# Altium PCB v4简化版PCB.PcbDoc
Units mm, origin at the board's own origin, x right, y up, seen from the top; angles counter-clockwise.
Board outline 152.4 x 101.6 mm, 2 copper layers (Top Layer, Bottom Layer); 89 components, 47 nets, 272 pads, 0 vias.
Unrouted connection lines stored in the file: 15.
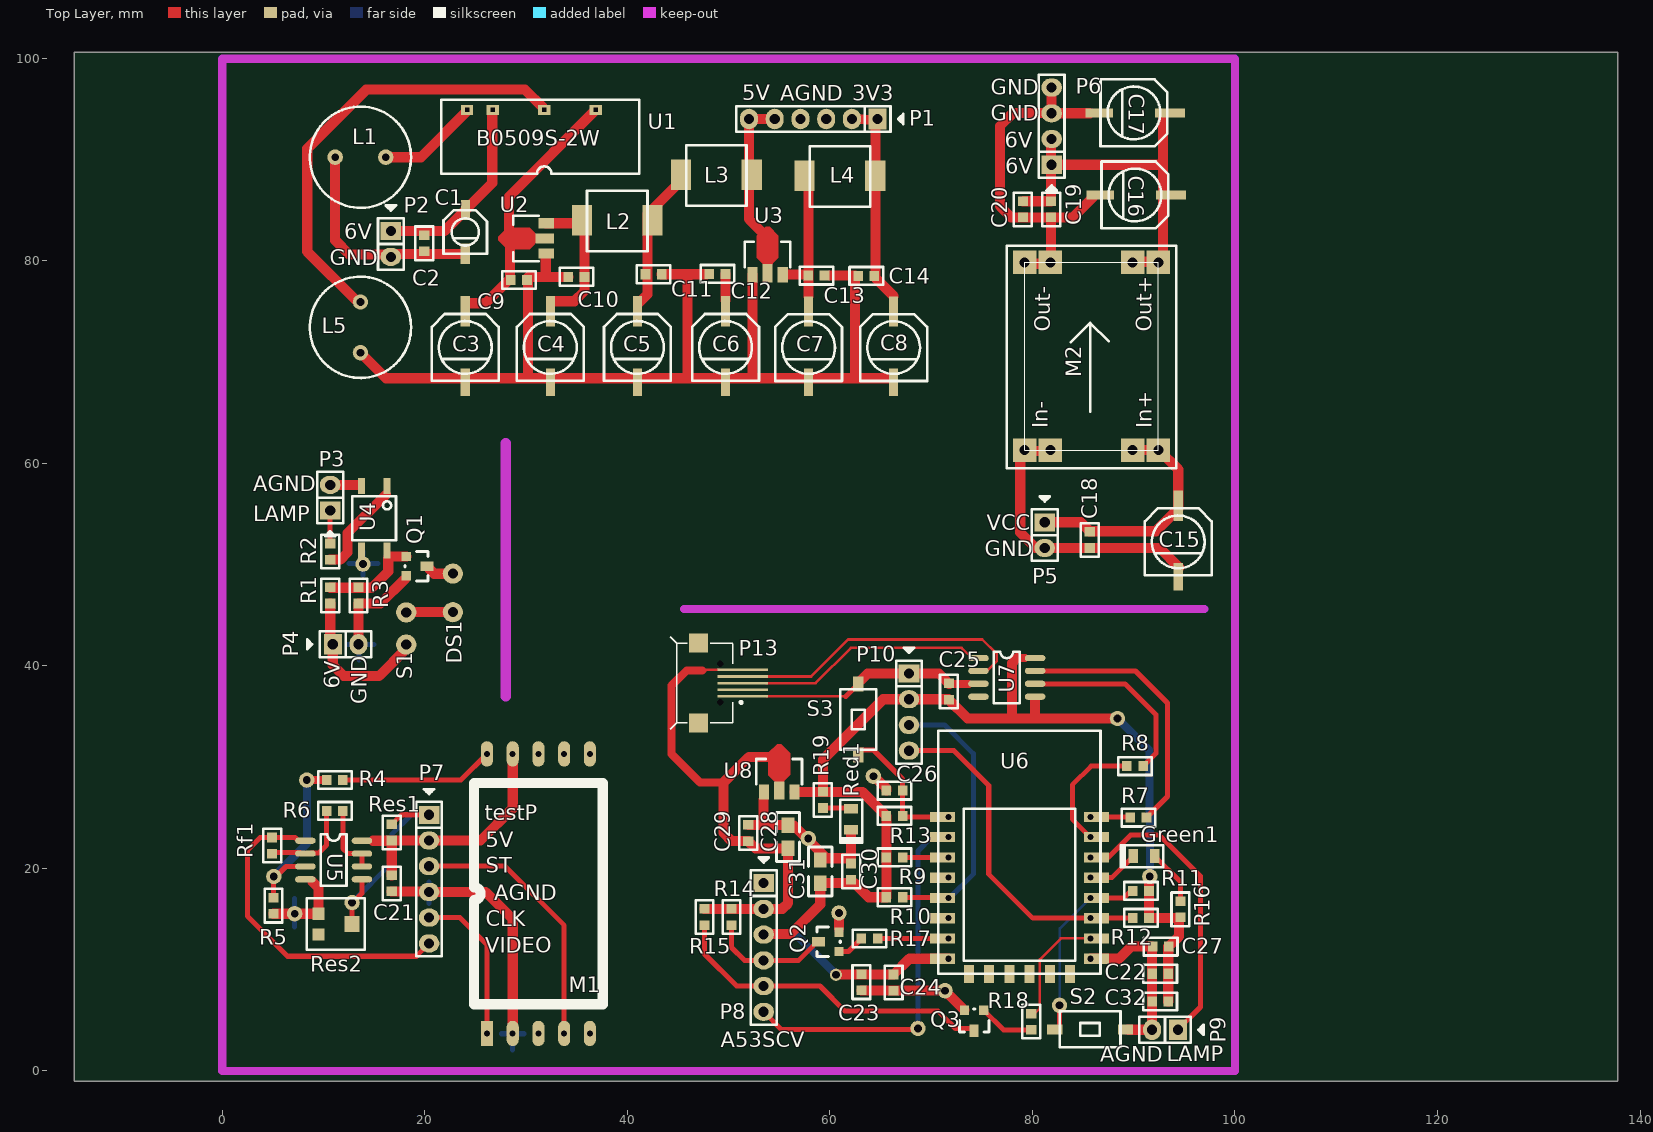
[diagram p0: Top Layer view]
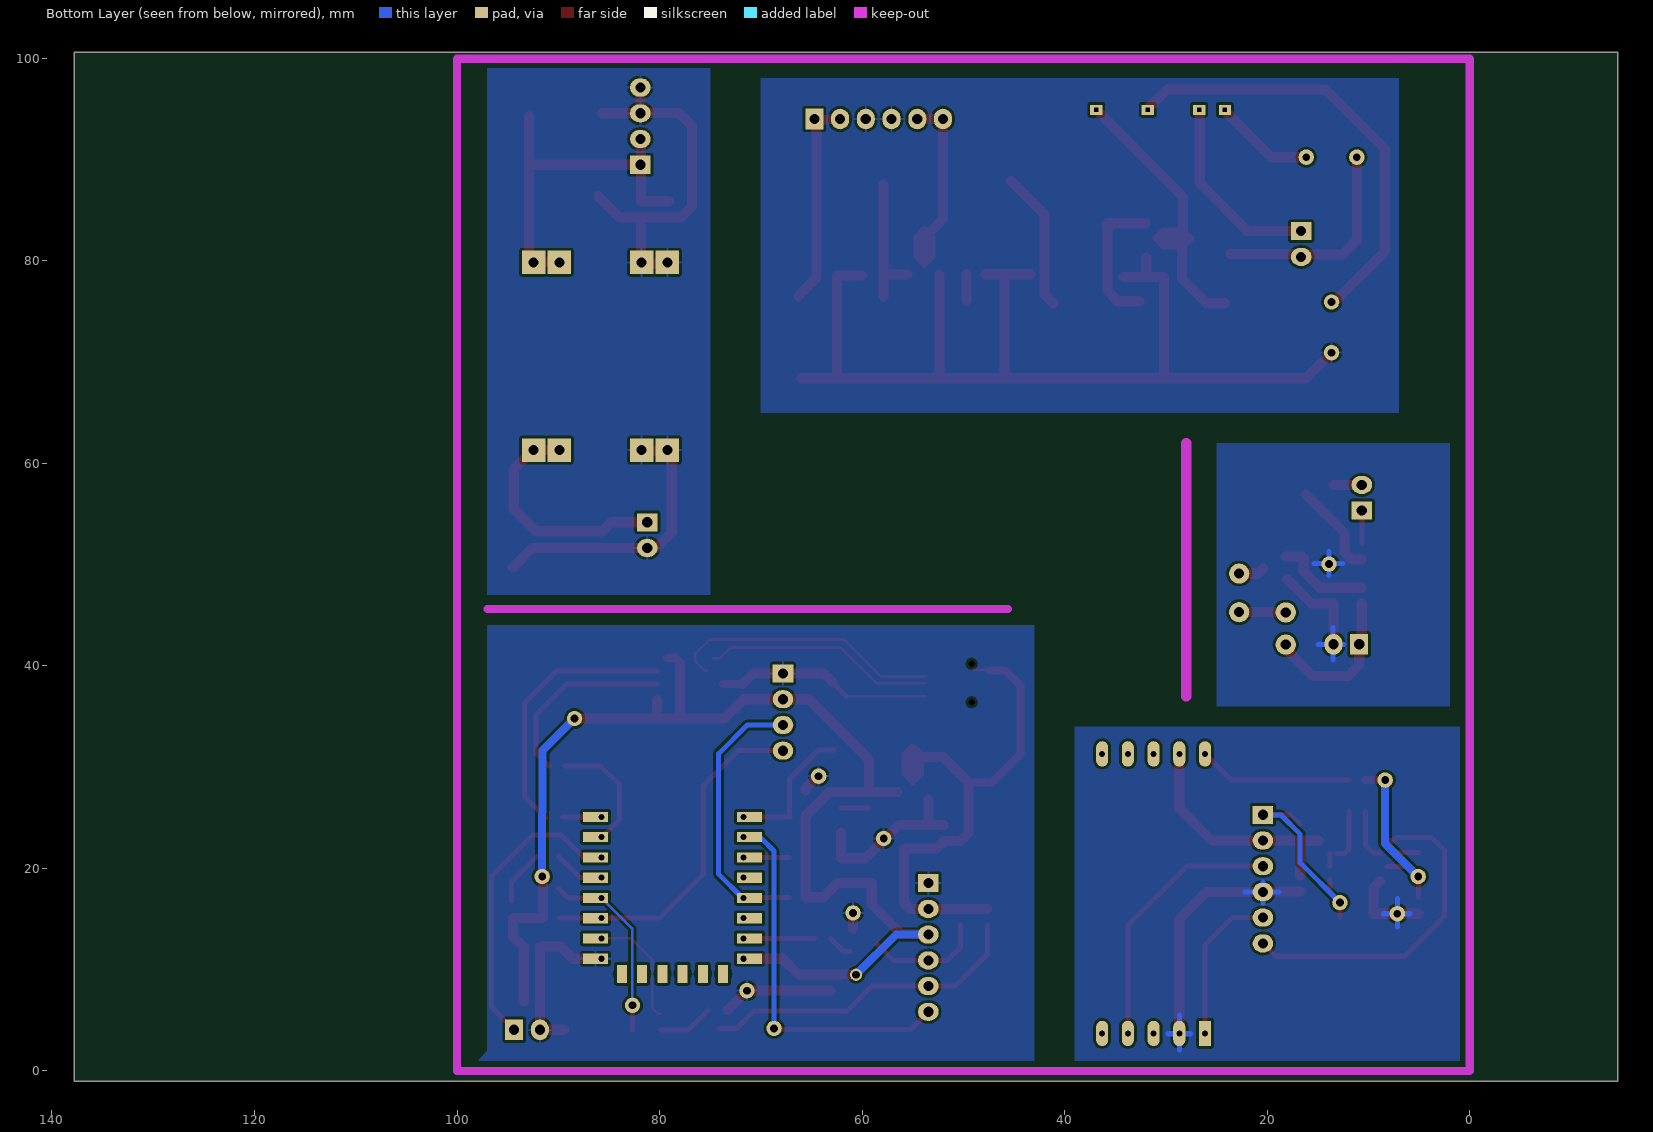
[diagram p1: Bottom Layer view, seen from below]
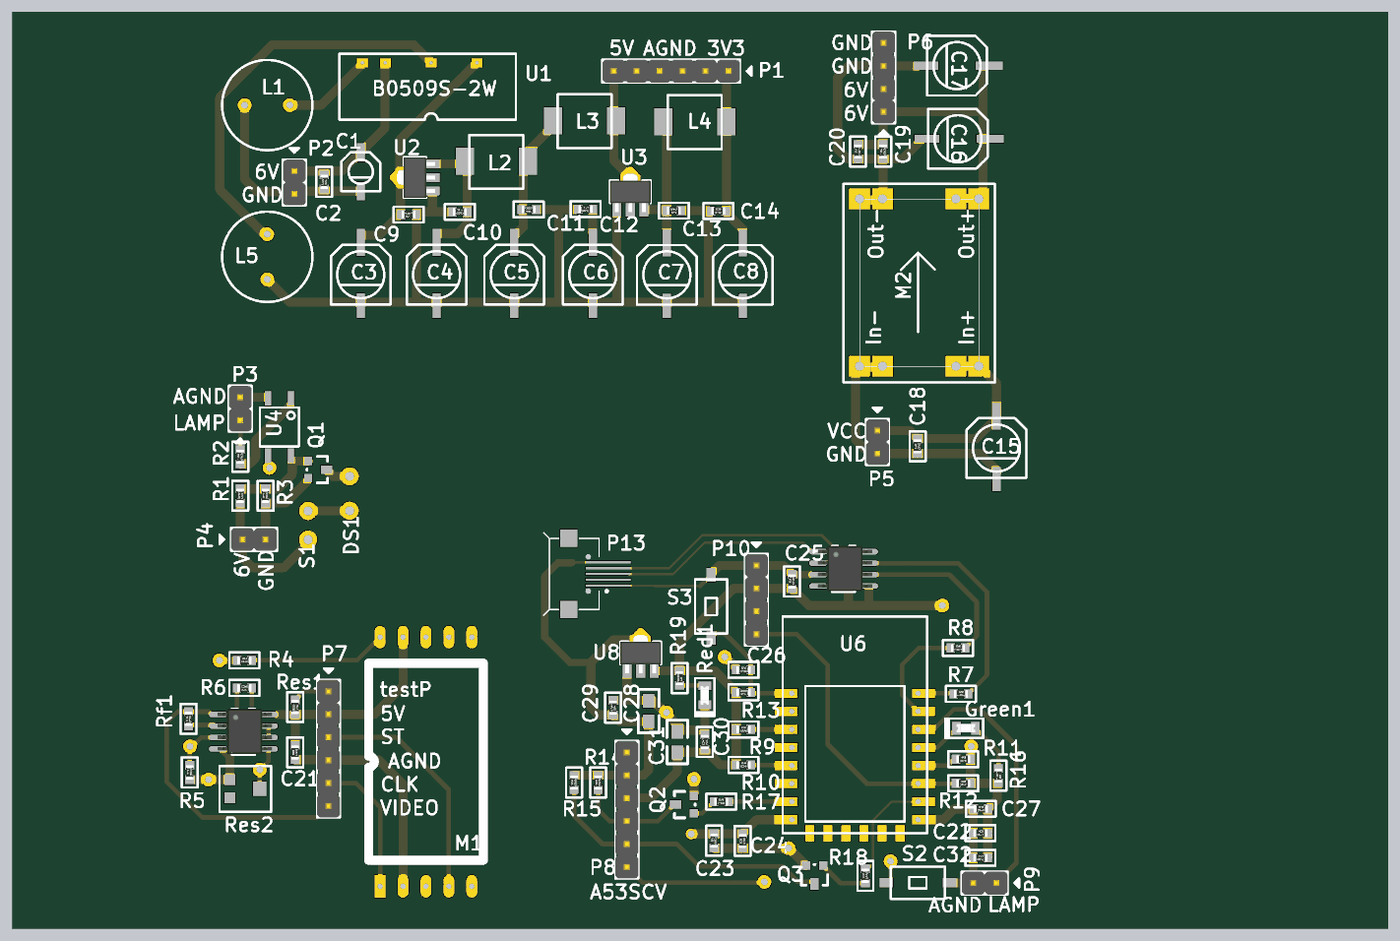
[diagram p2: 3D render of the assembled board from above, using the file's embedded part models]

## Layer stack, top to bottom
Top Solder: solder mask 0.0102, Solder Resist, Dk 3.5
Top Layer: signal copper 0.0356
Dielectric 1: dielectric 0.32, FR-4, Dk 4.8
Bottom Layer: signal copper 0.0356
Bottom Solder: solder mask 0.0102, Solder Resist, Dk 3.5

## Board outline
-14.605,-1.016 137.795,-1.016 137.795,100.584 -14.605,100.584

## Design rules (kind name [scope] priority, off if disabled: settings)
Clearance [All] p1: gap=0.254 ignorepadtopadclearanceinfootprint=FALSE
PolygonConnect [All] p1: connectstyle=Relief reliefconductorwidth=0.254 reliefentries=4 polygonreliefangle="90 Angle" airgapwidth=0.254
RoutingVias [All] p1: holewidth=0.711 width=1.27 viastyle="Through Hole" minholewidth=0.711 minwidth=1.27 maxholewidth=0.711 maxwidth=1.27
SolderMaskExpansion [All] p1: expansion=0.102
Width [All] p1: maxlimit=30 minlimit=0.254 preferedwidth=0.254 minimp=50.000000 maximp=50.000000 favimp=50.000000
30 further rules are at their usual default settings.

## Components (designator, comment, footprint, x,y, rotation, side; value= is the part's Value field where it differs from the comment)
C1 "4.7μF/16V 4*5.4mm" CAP4x5.4-SMD 21.85,85 r0 top value=100μF
C2 "100nF/50V" 0603 19.95,81.725 r270 top value=0.1μF
C3 "1μF(47uF)/25V" CAP6.3x5.4-SMD 20.698,74.746 r0 top value=100μF
C4 "100μF/16V" CAP6.3x5.4-SMD 29.098,74.746 r0 top value=100μF
C5 "100μF/16V" CAP6.3x5.4-SMD 37.698,74.746 r0 top value=100μF
C6 "100μF/16V" CAP6.3x5.4-SMD 46.398,74.746 r0 top value=100μF
C7 "100μF/16V" CAP6.3x5.4-SMD 54.598,74.731 r0 top value=100μF
C8 "100μF/16V" CAP6.3x5.4-SMD 62.998,74.731 r0 top value=100μF
C9 "100nF/50V" 0603 29.3,78.1 r180 top value=0.1μF
C10 "100nF/50V" 0603 34.974,78.41 r0 top value=0.1μF
C11 "100nF/50V" 0603 42.594,78.664 r180 top value=0.1μF
C12 "100nF/50V" 0603 48.9,78.7 r0 top value=0.1μF
C13 "100nF/50V" 0603 58.672,78.537 r180 top value=0.1μF
C14 "100nF/50V" 0603 63.6,78.5 r0 top value=0.1μF
C15 "100μF/16V" CAP6.3x5.4-SMD 91.098,55.546 r0 top value=100μF
C16 "100μF/16V" CAP6.3x5.4-SMD 93.431,89.802 r270 top value=100μF
C17 "100μF/16V" CAP6.3x5.4-SMD 93.331,97.902 r270 top value=100μF
C18 "100nF/50V" 0603 85.664,52.439 r90 top value=0.1μF
C19 "100nF/50V" 0603 81.854,85.078 r90 top value=0.1μF
C20 "100nF/50V" 0603 79.06,85.078 r90 top value=0.1μF
C21 "100nF/50V" 0603 16.745,18.527 r90 top value=0.1μF
C22 "100nF/50V" 0603 92.621,9.601 r0 top value=0.1μF
C23 "100nF/50V" 0603 63.119,8.763 r90 top value=0.1μF
C24 "100nF/50V" 0603 66.294,8.725 r90 top value=0.1μF
C25 "100nF/50V" 0603 71.755,37.465 r90 top value=0.1μF
C26 "100nF/50V" 0603 66.383,27.686 r0 top value=0.1μF
C27 "100nF/50V" 0603 92.672,12.281 r0 top value=0.1μF
C28 "10μF/10V" 0805 55.88,21.971 r90 top value=0.1μF
C29 "100nF/50V" 0603 51.943,23.495 r270 top value=0.1μF
C30 "100nF/50V" 0603 62.103,19.685 r270 top value=0.1μF
C31 "10μF/10V" 0805 59.055,18.542 r90 top value=0.1μF
C32 "100nF/50V" 0603 92.621,6.858 r0 top value=0.1μF
DS1 "Lamp" LAMP 22.775,45.3 r90 top
Green1 "LED2" 0805-LED 91.025,21.209 r180 top
L1 "Inductor" "L 0810" 16.15,90.225 r180 top value=4k7uH/100mA
L2 "Inductor" 0650 36.023,86.921 r0 top value=33uH/3A
L3 "Inductor" 0650 45.8,91.421 r0 top value=33uH/3A
L4 "Inductor" 0650 58,91.321 r0 top value=33uH/3A
L5 "Inductor" "L 0810" 13.65,75.925 r270 top value=4k7uH/100mA
M1 "Spectro" c10988ma 26.143,3.706 r90 top
M2 "MP1584EN" MP1584EN模块 77.454,59.522 r90 top
P1 "pin 6" PIN-6-2.54-1.0 58.369,93.995 r180 top
P2 "pin 2" PIN-2-2.54-1.0 16.65,81.655 r270 top
P3 "pin 2" PIN-2-2.54-1.0 10.664,56.605 r90 top
P4 "pin 2" PIN-2-2.54-1.0 12.188,42.127 r0 top
P5 "pin 2" PIN-2-2.54-1.0 81.219,52.909 r270 top
P6 "pin 4" PIN-4-2.54-1.0 81.9,93.29 r90 top
P7 "pin 6" PIN-6-2.54-1.0 20.428,18.946 r270 top
P8 "pin 6" PIN-6-2.54-1.0 53.467,12.192 r270 top
P9 "pin 2" PIN-2-2.54-1.0 93.091,4.064 r180 top
P10 "pin 4" PIN-4-2.54-1.0 67.818,35.433 r270 top
P13 "MINI-USB" Micro_USB全贴片 44.892,38.3 r180 top
Q1 "NMOS-CJ8810" SOT-23 18.175,50.8 r270 top
Q2 "MMBT3904" SOT-23 60.9,11.795 r90 top
Q3 "MMBT3904" SOT-23 75.205,6 r180 top
R1 "10K" 0603 10.664,46.953 r270 top value=100K
R2 "1k" 0603 10.664,51.284 r90 top value=100K
R3 "100K" 0603 13.458,46.953 r90 top
R4 "33K" 0603 11.119,28.725 r0 top
R5 "33K" 0603 5.061,16.317 r90 top
R6 "10K" 0603 11.119,25.677 r180 top
R7 "300R/1%" 0603 90.462,25.019 r0 top value=10K
R8 "300R/1%" 0603 90.132,30.099 r0 top value=10K
R9 "10K" 0603 66.383,21.082 r0 top
R10 "10K" 0603 66.383,17.145 r0 top
R11 "10K" 0603 90.716,17.78 r0 top
R12 "10K" 0603 90.716,15.113 r0 top
R13 "10K" 0603 66.383,25.184 r180 top
R14 "10K" 0603 50.292,15.202 r90 top
R15 "10K" 0603 47.625,15.202 r90 top
R16 "10K" 0603 94.615,15.964 r270 top
R17 "1K" 0603 63.919,13.081 r0 top value=10K
R18 "1K" 0603 79.883,4.864 r90 top value=10K
R19 "10K" 0603 59.309,26.759 r270 top
Red1 "LED1" 0805-LED 62.103,24.858 r270 top
Res1 "51K" 0603 16.745,23.556 r270 top
Res2 "5K" RES-ADJ 12.808,14.501 r270 top value=3.3K
Rf1 "12K" 0603 4.934,22.248 r90 top value=33K
S1 "SW-SPST" swich-big 18.175,42.1 r90 top
S2 "BOOT" Swich-mini 82.2,4.1 r0 top
S3 "RESET" Swich-mini 62.8,31.2 r90 top
U1 "B0509S-2W" B0509S-2W 24.18,89.312 r0 top
U2 "HT7550" SOT-89 30,82.2 r90 top
U3 "HT7533" SOT-89 53.85,80.625 r0 top
U4 "EL357" SOP4-bigger 16.275,57.75 r270 top
U5 "AD8606" SOP8 8.236,22.756 r0 top
U6 "ESP8266_12F" esp8266-12f 83.028,10.16 r180 top
U7 "CH340N" SOP8 74.701,40.792 r0 top
U8 "HT7533" SOT-89 55,29.55 r0 top

## Footprints (in the part's own frame and the unit in brackets; to place one, negate y for a bottom-side part, rotate by r counter-clockwise, add the part's x,y. Pads: shape width x height; smd on the part's side, far side on the other; paste and mask are expansions set on the pad)
0603 [mm] "SMD, 0603"
  rect 0.95x1 smd: 1(-0.8,0) 2(0.8,0)
  silkscreen extent -1.66,-0.88 1.66,0.88, body extent -0.77,-0.43 0.77,0.43, height 0.45
0650 [mm] "贴片电感6*6*5，33uH 3A"
  rect 2x3 smd: 1(-0.5,-2.921) 2(6.477,-2.921)
  silkscreen extent 0,-5.97 5.97,0
0805 [mil]
  rect 60x50 smd: 1(0,0) 2(90,0)
  silkscreen extent -50,-45 140,45
0805-LED [mm] "LED, SMD, 0805"
  rect 0.95x1.4 smd: 1(-1.05,0) 2(1.05,0)
  silkscreen extent -1.9,-1.08 2.3,1.08, body extent -1.03,-0.46 1.03,0.45, height 0.85
B0509S-2W [mm]
  rect 1.2x1 hole 0.4 square: 1(0,5.588) 2(2.54,5.588) 4(7.62,5.588) 6(12.7,5.588)
  silkscreen extent -2.54,-0.7 17,6.6
c10988ma [mm]
  rect 2.5x1.2 hole 0.6: 1(0,0)
  oval 2.5x1.2 hole 0.6: 2(0,-2.54) 3(0,-5.08) 4(0,-7.62) 5(0,-10.16) 6(27.6,-10.16) 7(27.6,-7.62) 8(27.6,-5.08) 9(27.6,-2.54) 10(27.6,0)
  silkscreen extent 2.89,-11.43 24.72,1.27
CAP4x5.4-SMD [mm] "贴片铝电解电容 4.7uF/16V"
  rect 0.9x2 smd: 1(2.159,0) 2(2.15,-4.3)
  silkscreen extent 0,-4.3 4.3,0
CAP6.3x5.4-SMD [mm] "贴片铝电解电容"
  rect 0.9x3 smd: 1(3.302,0.254)
  rect 0.9x2.7 smd: 2(3.302,-6.731)
  silkscreen extent 0,-6.6 6.6,0
esp8266-12f [mm]
  rect 2.5x1 hole 0.6 copper offset 0.6,0: 1(11.303,-14.922) 2(11.303,-12.922) 3(11.303,-10.922) 4(11.303,-8.922) 5(11.303,-6.922) 6(11.303,-4.922) 7(11.303,-2.922) 8(11.303,-0.922)
  rect 1x1.8 all layers, no hole: 9(9.303,0.578) 10(7.303,0.578) 11(5.303,0.578) 12(3.303,0.578) 13(1.303,0.578) 14(-0.697,0.578)
  rect 2.5x1 hole 0.6 copper offset -0.6,0: 15(-2.697,-0.922) 16(-2.697,-2.922) 17(-2.697,-4.922) 18(-2.697,-6.922) 19(-2.697,-8.922) 20(-2.697,-10.922) 21(-2.697,-12.922) 22(-2.697,-14.922)
  silkscreen extent -3.7,-23.42 12.3,0.58
"L 0810" [mil] "电感4.7mH 100mA 8Ω"
  round 60 hole 30: 1(0,0) 2(196.85,0)
  silkscreen extent -98,-197 295,197
LAMP [mm]
  round 2 hole 1: 1(0,0) 2(3.81,0)
Micro_USB全贴片 [mm]
  rect 5x0.25 smd: 1(-6.508,-1.3) 2(-6.508,-0.65) 3(-6.508,0) 4(-6.508,0.65) 5(-6.508,1.3)
  round 0 hole 0.635 unplated: MH1(-4.3,1.9) MH2(-4.3,-1.9)
  rect 1.9x1.9 smd: ""(-2.15,3.95) ""(-2.15,-3.95)
  silkscreen extent -6.47,-4.57 0.63,4.57
MP1584EN模块 [mm]
  rect 2.3x2.3 hole 1: 0(1.778,-12.446) 0(1.778,-14.986) 1(1.778,-1.778) 1(1.778,-4.318) 2(20.32,-14.986) 2(20.32,-12.446) 3(20.32,-4.318) 3(20.32,-1.778)
  silkscreen extent 0,-16.76 21.97,0
PIN-2-2.54-1.0 [mil] "Pin Header"
  rect 70x80 hole 39.37: 1(-50,0)
  oval 70x80 hole 39.37: 2(50,0)
  silkscreen extent -150,-50 100,50, body extent -100,-50 100,50, height 398
PIN-4-2.54-1.0 [mil] "Pin Header"
  rect 70x80 hole 39.37: 1(-150,0)
  oval 70x80 hole 39.37: 2(-50,0) 3(50,0) 4(150,0)
  silkscreen extent -250,-50 200,50, body extent -200,-50 200,50, height 398
PIN-6-2.54-1.0 [mil] "Pin Header"
  rect 70x80 hole 39.37: 1(-250,0)
  oval 70x80 hole 39.37: 2(-150,0) 3(-50,0) 4(50,0) 5(150,0) 6(250,0)
  silkscreen extent -350,-50 300,50, body extent -300,-50 300,50, height 398
RES-ADJ [mm]
  rect 1.2x1.2 smd: 1(-1.016,-3.302) 3(1.016,-3.302)
  rect 1.6x1.5 smd: 2(0,0)
  silkscreen extent -2.54,-4.45 2.54,1.27
SOP4-bigger [mm] "EL357"
  rect 1.6x0.7 smd: 1(0,0) 2(0,-2.54) 3(6.35,-2.54) 4(6.35,0)
  silkscreen extent 1.02,-3.43 5.33,0.89
SOP8 [mil] "封装库来自淘宝卖家 ID：黄晶宝石"
  oval 80x24 smd: 1(-1,-1) 2(-1,-51) 3(-1,-101) 4(-1,-151) 5(219,-151) 6(219,-101) 7(219,-51) 8(219,-1)
  silkscreen extent 59,-176 159,24, body extent -4,-174 234,24, height 63
SOT-23 [mil]
  rect 36x36 smd: 1(0,0) 2(75,0)
  rect 36x50 smd: 3(38,80)
  silkscreen extent -20,-5 95,85
SOT-89 [mm] "SOT-89, TO-243AA"
  rect 1x1.5 smd: 1(-1.5,-2) 3(1.5,-2)
  rect 1x1.8 smd: 2(0,-1.85)
  Top Layer region: 0,-1.45 1.1,-0.35 0,0.75 -1.1,-0.35
  Top Layer region: -0.202,0.952 0.696,1.85 -0.202,2.748 -1.1,1.85
  Top Layer region: 0.202,0.952 1.1,1.85 0.202,2.748 -0.696,1.85
  Top Layer region: -0.198,1.848 0.202,1.848 0.202,2.748 -0.198,2.748
  Top Layer region: -1.1,-0.35 1.1,-0.35 1.1,1.85 -1.1,1.85
  silkscreen extent -2.25,-1.25 2.25,1.25, body extent -2.25,-2.25 2.25,2, height 1.54
swich-big [mm]
  round 2 hole 1: 1(0,0) 2(3.175,0)
Swich-mini [mm] "3*6*2.5轻触开关贴片 12V 50mA"
  rect 1.5x1 smd: 1(0,0) 2(7,0)
  silkscreen extent 0.5,-1.78 6.5,1.78

## Part data
C1 C3 C4 C5 C6 C7 C8 C15 C16 C17: library part "Cap Pol1", "Polarized Capacitor (Radial)", LatestRevisionDate=17-Jul-2002, LatestRevisionNote="Re-released for DXP Platform.", PackageDescription="Polarized Capacitor (Radial); 2 Leads", PackageReference=RB7.6-15, Published=8-Jun-2000, Publisher="Altium Limited"
C2 C9 C10 C11 C12 C13 C14 C18 C19 C20 C21 C22 C23 C24 C25 C26 C27 C28 C29 C30 C31 C32: library part Cap, "Capacitor", LatestRevisionDate=17-Jul-2002, LatestRevisionNote="Re-released for DXP Platform.", PackageDescription="Radial Cap, Thru-Hole; 2 Leads; 0.3 in Pin Spacing", PackageReference=RAD-0.3, Published=8-Jun-2000, Publisher="Altium Limited"
DS1: "Incandescent Bulb", LatestRevisionNote="Re-released for DXP Platform.", PackageReference=PIN2, Published=24-Mar-1999, Publisher="Altium Limited"
Green1: library part LED1, "Typical RED GaAs LED", LatestRevisionDate=08-Jul-2005, LatestRevisionNote="Mech Layer 1 removed.", PackageDescription="LED; 2 Leads", PackageReference=LED-1, Published=8-Jun-2000, Publisher="Altium Limited"
M2: library part MP1584EN模块
P13: library part MINI-USB_JX
Q1: library part NMOS-2, "N-Channel Power MOSFET", ComponentLink1Description="Manufacturer Link", ComponentLink1URL=http://www.irf.com/, DatasheetVersion=PD-9.814, LatestRevisionDate=17-Jul-2002, LatestRevisionNote="Re-released for DXP Platform.", Note="Pin 2 is electrically connected to pin 4.", PackageDescription="TO, Thru-Hole, Vertical, Heatsink Mounted; 3 In-Line Leads; Pitch 2.54 mm", PackageReference=TO-220AB, PackageVersion=Feb-1997, Published=8-Jun-2000, Publisher="Altium Limited"
Q2 Q3: library part 2N3904, "NPN General Purpose Amplifier", ComponentLink1Description="Manufacturer Link", ComponentLink1URL=http://www.fairchildsemi.com/, ComponentLink2Description=Datasheet, ComponentLink2URL=http://www.fairchildsemi.com/ds/2N%2F2N3904.pdf, DatasheetVersion=1997, LatestRevisionDate=15-Jan-2003, LatestRevisionNote="PCB Footprint 'BCY-W3/D4.7' replaced", PackageDescription="TO, Flat Index; 3 In-Line, Axial Leads; Body Dia. 4.5mm; Leads 0.51 x 0.48 mm (max)", PackageReference=TO-92A, PackageVersion=Sep-1998, Published=8-Jun-2000, Publisher="Altium Limited"
R1 R2 R3 R4 R5 R6 R7 R8 R9 R10 R11 R12 R13 R14 R15 R16 R17 R18 R19 Res1 Rf1: library part Res2, "Resistor", LatestRevisionDate=17-Jul-2002, LatestRevisionNote="Re-released for DXP Platform.", PackageDescription="Axial Device, Thru-Hole; 2 Leads; 0.4 in Pin Spacing", PackageReference=AXIAL-0.4, Published=8-Jun-2000, Publisher="Altium Limited"
Red1: "Typical RED GaAs LED", LatestRevisionDate=08-Jul-2005, LatestRevisionNote="Mech Layer 1 removed.", PackageDescription="LED; 2 Leads", PackageReference=LED-1, Published=8-Jun-2000, Publisher="Altium Limited"
Res2: library part "Res Adj2", "Variable Resistor", LatestRevisionDate=17-Jul-2002, LatestRevisionNote="Re-released for DXP Platform.", PackageDescription="Axial Device, Thru-Hole; 2 Leads; 0.6 in Pin Spacing", PackageReference=AXIAL-0.6, Published=8-Jun-2000, Publisher="Altium Limited", Set Position=0.5
S1: "Single-Pole, Single-Throw Switch", LatestRevisionDate=17-Jul-2002, LatestRevisionNote="Re-released for DXP Platform.", PackageDescription="Switch; 2 Leads", PackageReference=SPST-2, Published=24-Mar-1999, Publisher="Altium Limited"
S2 S3: library part SW-PB, "Switch", LatestRevisionDate=17-Jul-2002, LatestRevisionNote="Re-released for DXP Platform.", PackageDescription="Switch; 2 Leads", PackageReference=SPST-2, Published=24-Mar-1999, Publisher="Altium Limited"
U2 U3 U8: library part "Volt Reg", "Voltage Regulator", LatestRevisionDate=29-May-2009, LatestRevisionNote="IPC-7351 Footprint Added.", PackageDescription="3-Pin Transistor Outline Package 2.54 mm Pitch, 15.1 mm Lead Span", PackageReference=D2PAK, Published=24-Mar-1999, Publisher="Altium Limited"
U4: library part Optoisolator1, "4-Pin Phototransistor Optocoupler", DatasheetVersion=Nov-2003, LatestRevisionDate=04-Mar-2005, LatestRevisionNote="Sch pins 3 & 4 Swapped.", PackageReference=DIP-4, Published=24-Mar-1999, Publisher="Altium Limited"
U5: library part LM358
L1 L2 L3 L4 L5: Code_IEC=1005, Code_JEITA=0402, LatestRevisionDate=29-May-2009, LatestRevisionNote="IPC-7351 Footprint Added.", PackageDescription="Chip Inductor", PackageReference=0402-A, Published=8-Jun-2000, Publisher="Altium Limited"

## Free pads (board coordinates)
  round 1.524 hole 0.762: 5(5.1,19.2) 6(8.36,28.725) 18(82.677,6.477) 20(68.7,4.2) 29(91.6,19.2) 30(88.4,34.8) 34(7.15,15.525) 36(64.3,29.107) 42(12.825,16.625) 43(71.375,7.925) 45(60.9,15.6) 46(13.9,50.05) 47(57.875,22.95)
  round 1.2 hole 0.762: 38(60.6,9.5)

## Nets (pads, with @x,y where several pads share a name; then routed paths per layer and width w, separated by ;. In a path a pad name is that pad's centre, name@x,y a point inside that pad or via, vN(x,y) a via of type N, cw(c..) or ccw(c..) an arc to the next point about the centre after c; other vN are vias at no path point)
0V3: R6.1 U5.6 U5.7 | length 6.5
  Top Layer w0.5: R6.1 11.919,21.96 12.393,21.486 U5.7@13.189,21.486 ; U5.6 U5.7
3V3: C8.1 C14.2 C22.2 C23.2 C24.2 C25.1 C27.2 C30.2 C31.1 C32.2 L4.2 P1.1 P1.2 P8.3 P10.2 pad.29 pad.30 pad.38 R9.1 R10.1 R11.2 R12.2 R13.2 R16.2 R19.1 U6.8 U7.5 U7.8 U8.3 | length 152
  Top Layer w0.8: 78.486,40.767 U7.8@79.267,40.767
  Top Layer w1: P8.3@53.467,13.513 56.124,13.513 59.055,16.444 C31.1 62.446,18.542 63.843,17.145 R10.1 R9.1 R13.2 63.208,27.559 59.332,27.559 R19.1@59.309,27.536 ; U8.3@56.509,27.559 R19.1 59.309,30.734 65.278,36.703 P10.2 71.717,36.703 C25.1 73.622,34.798 78,34.798 ; pad.38 63.117,9.508 63.119,9.508 C24.2 67.851,11.082 U6.8 ; P1.2 64.519,93.895 64.519,88.4 64.519,78.281 66.3,76.5 ; 78.486,40.767 78,40.281 78,34.798 ; 80.264,34.889 80.264,36.6 ; pad.30 86.898,34.798 78,34.798 ; pad.29@91.516,19.2 R11.2 R12.2 94.487,15.113 94.487,13.296 C27.2 ; C32.2 C22.2 C27.2@93.421,12.281
  Bottom Layer w0.8: P8.3 56.638,13.462 pad.38@60.594,9.506 ; pad.30 91.571,31.644 pad.29
5V: C6.1 C12.2 C21.2 C28.1 C29.2 L3.2 M1.9 P1.5 P1.6 P7.2 P8.2 P13.1 R14.2 R15.2 Res1.2 U3.2 U5.8 U8.2 | length 91
  Top Layer w0.254: 47.45,39.6 P13.1@49.05,39.6
  Top Layer w0.8: 47.4,39.55 45.875,39.55 44.375,38.05 44.375,31.3 47.175,28.5 49.5,28.5
  Top Layer w1: 14.895,22.731 Res1.2@16.745,22.731 ; C21.2 Res1.2@16.745,22.731 ; M1.9 28.683,25.931 25.508,22.756 P7.2 Res1.2 Res1.2@16.745,22.731 ; R15.2 R14.2 P8.2 55.313,16.002 55.88,16.569 C28.1 52.667,21.971 C29.2 50.305,22.695 49.5,23.5 49.5,28.5 ; 49.662,28.663 52,31 54.3,31 ; C6.1@49.7,76.092 C12.2 ; 53.652,82.473 52.019,84.106 P1.6 P1.5
6V: C1.1 C2.1 C16.1 C17.1 C19.2 C20.2 M2.2 P2.1 P4.1 P6.1 P6.2 R1.2 S1.1 U1.2 | length 69.6
  Top Layer w1: R1.2 10.664,42.381 P4.1 10.918,40.082 12,39 15.496,39 S1.1@18.175,41.679 ; P2.1@17.45,82.925 21.925,82.925 26.67,87.67 26.67,94.375 ; C20.2 C19.2 P6.2@81.854,91.96 ; P6.1@81.9,89.485 92.9,89.485 ; M2.2@89.982,79.9 M2.2@92.522,79.9 ; M2.2@92.9,80 92.9,89.485 ; C17.1@92.9,94.3 92.9,89.485
A-GND: C3.2 C4.2 C5.2 C6.2 C7.2 C8.2 C9.1 C10.1 C11.1 C12.1 C13.1 C14.1 C21.1 C22.1 C23.1 C24.1 C25.2 C26.1 C27.1 C28.2 C29.1 C30.1 C31.2 C32.1 L5.2 M1.2 P1.3 P1.4 P3.2 P7.4 P8.1 P9.2 P10.1 P13.5 pad.34 pad.36 pad.43 pad.45 pad.47 Q2.2 Q3.2 R5.1 Red1.2 Res2.1 S2.2 S3.2 U2.1 U3.1 U4.2 U5.4 U6.15 U7.3 U8.1 | length 227.5
  Top Layer w0.254: P13.5@53.75,37 61.572,36.979 ; S3.2@62.941,38.184 S3.2@62.975,38.475
  Top Layer w0.5: 61.572,36.979 S3.2
  Top Layer w0.8: C25.2@71.793,38.227 U7.3@73.727,38.227
  Top Layer w1: R5.1 Res2.1 9.506,18.094 U5.4@8.85,18.75 ; P3.2 U4.2@13.458,57.875 ; L5.2@13.65,70.917 16.167,68.4 45.934,68.4 ; C21.1 P7.4@20.377,17.727 ; P7.4 26.016,17.676 28.683,15.009 M1.2 ; 30.186,68.5 30.186,78.41 C10.1 ; 31.95,78.41 U2.1@31.95,80.325 ; C11.1 45.934,78.664 ; C12.1@47.8,78.664 45.934,78.664 ; C29.1 53.467,24.295 ; 52.35,68.5 U3.1 ; U8.1@53.467,26.8 53.467,24.295 ; 60,78.537 62.495,78.537 62.495,68.7 ; Q2.2@60.9,14 pad.45 ; Red1.2@62.103,23.525 62.103,21 59.662,21 56.367,24.295 53.467,24.295 ; S3.2@62.975,38.475 63.743,39.243 P10.1 70.777,39.243 C25.2 C25.2@71.793,38.227 ; C23.1@63.119,7.925 C24.1 pad.43 Q3.2 ; pad.36 65.583,27.917 C26.1 ; C8.2@66,68.4 45.934,68.4 ; U6.15 88.552,11.082 89.751,12.281 91.821,12.281 C22.1 C32.1 91.821,4.31 91.575,4.064 S2.2@89.423,4.064 ; 45.934,68.4 45.934,78.664
  Bottom Layer w0: U6.15@86.3,11.082 U6.15@86.3,11.1
  Bottom Layer w0.5: 5.925,15.525 pad.34 ; 7.15,14.2 pad.34 ; 7.15,17.025 pad.34 ; 8.525,15.525 pad.34 ; 18.85,17.676 P7.4@20.425,17.676 ; 20.425,16.55 P7.4@20.425,17.676 ; 20.425,18.675 P7.4@20.425,17.676 ; 22.199,17.676 P7.4 P7.4@20.425,17.676 ; 27.575,3.675 M1.2@28.65,3.675 ; 28.65,2.075 M1.2@28.65,3.675 ; 28.65,5.525 M1.2@28.65,3.675 ; 29.8,3.675 M1.2@28.65,3.675
BOOT: pad.18 R11.1 S2.1 U6.18 | length 18.1
  Top Layer w0.5: S2.1@82.677,4.064 pad.18 ; U6.18 89.015,17.082 R11.1@89.967,18.034
  Bottom Layer w0.254: 82.709,7.239 82.709,14.066 U6.18
CH340_RXD: R7.2 U7.7 | length 26.6
  Top Layer w0.5: U7.7 90.17,39.497 93.345,36.322 93.345,27.102 R7.2
CH340_TXD: R8.2 U7.6 | length 18.8
  Top Layer w0.5: U7.6 89.154,38.227 92.202,35.179 92.202,31.369 R8.2
CLK: M1.1 P7.5 P8.5 Q3.3 R15.1 | length 48
  Top Layer w0.5: P7.5 23.476,15.136 26.143,12.469 M1.1 ; R15.1 47.625,11.557 50.8,8.382 P8.5 59.018,8.382 61.5,5.9 70.7,5.9 72.4,4.2 Q3.3@74.116,4.2
CLK_in: R18.2 U6.16 | length 11.7
  Top Layer w0.254: R18.2 80.213,5.664 80.741,6.192 80.741,11.018 82.805,13.082 U6.16
ESP_RST: C26.2 R13.1 S3.1 U6.1 | length 14
  Top Layer w0.5: S3.1@62.8,31.7 64.3,31.7 67.183,28.817 C26.2 R13.1 R13.1@67.183,25.082 ; U6.1 R13.1@67.183,25.082 ; R13.1@67.183,25.082 67.17,25.082 67.145,25.057 67.183,25.057 R13.1@67.183,25.082
GND: C15.2 C16.2 C17.2 C18.1 C19.1 C20.1 L1.1 M2.1 M2.3 P4.2 P5.2 P6.3 P6.4 pad.46 Q1.2 R3.1 U1.1 U4.3 | length 96.7
  Top Layer w1: P4.2 R3.1 15.622,46.153 Q1.2@18.022,48.553 ; L1.1 19.625,90.225 U1.1@24.063,94.663 ; M2.3@79.314,79.7 81.854,79.7 C19.1 ; M2.1@81.854,61.2 81.772,61.2 78.806,61.2 78.806,53.163 80.33,51.639 P5.2 C18.1 92.561,51.639 C15.2@94.5,49.7 ; P6.4@81.9,97.2 P6.4 81.9,94.6 P6.3@82.3,94.6 ; C17.2@85.66,94.56 P6.3 81.86,94.6 78.1,94.6 76.8,93.3 76.8,85.395 77.917,84.278 C20.1 C19.1 ; C16.2@86.1,86.4 83.978,84.278 C19.1
  Bottom Layer w0.5: 12.405,42.1 P4.2@13.5,42.1 ; 12.5,50.1 pad.46@13.9,50.1 ; 13.5,40.6 P4.2@13.5,42.1 ; 13.5,43.8 P4.2@13.5,42.1 ; 13.9,48.9 pad.46 pad.46@13.9,50.1 ; 13.9,51.3 pad.46@13.9,50.1 ; 15,42.1 P4.2@13.5,42.1 ; 15.4,50.1 pad.46@13.9,50.1
LAMP: P3.1 P9.1 R2.2 U6.20 | length 32.8
  Top Layer w0.5: R2.2 P3.1 ; U6.20 87.482,21.082 89.7,23.3 92.524,23.3 96.6,19.224 96.6,6.303 P9.1
LED: Green1.2 U6.19 | length 5.1
  Top Layer w0.5: U6.19 87.848,19.082 Green1.2
NetC1_2: C1.2 C2.2 L1.2 P2.2 | length 19.8
  Top Layer w1: L1.2 11.15,82.025 12.55,80.625 P2.2@15.85,80.625 ; P2.2@17.35,80.685 C1.2@23.65,80.685
NetC3_1: C3.1 C9.2 U1.6 U2.2 | length 25.3
  Top Layer w1: C3.1@24.2,75.8 26,75.8 28.408,78.208 28.408,82.474 ; 28.33,82.652 28.33,86.35 U1.6
NetC4_1: C4.1 C10.2 L2.1 U2.3 | length 14.6
  Top Layer w0.5: L2.1@35.361,83.141 L2.1@35.774,82.728
  Top Layer w1: U2.3 L2.1@35.722,83.7 ; C4.1@32.6,76 34.761,76 35.774,77.013 C10.2 35.774,82.728 35.806,83.019 35.81,83.057 35.826,83.2 35.829,83.23 35.857,83.485 35.859,83.5 35.867,83.573 35.874,83.636 35.862,83.636 35.833,83.637 L2.1@35.783,83.638
NetC5_1: C5.1 C11.2 L2.2 L3.1 | length 13.8
  Top Layer w1: C5.1@41.1,75.8 41.997,76.697 41.997,84 41.997,84.597 L3.1@45.3,87.9
NetC7_1: C7.1 C13.2 L4.1 U3.3 | length 13.2
  Top Layer w1: U3.3@55.55,78.641 C13.2@57.768,78.641 ; 57.895,76.5 L4.1@57.895,87.5
NetC15_1: C15.1 C18.2 M2.0 P5.1 | length 23.7
  Top Layer w1: P5.1 84.775,54.179 85.664,53.29 92.19,53.29 94.4,55.5 C15.1 94.4,59.4 92.5,61.3 92.44,61.3 M2.0@89.9,61.3
NetDS1_1: DS1.1 S1.2 | length 3.2
  Top Layer w1: S1.2@19.087,45.302 DS1.1@22.262,45.302
NetDS1_2: DS1.2 Q1.3 | length 2.4
  Top Layer w1: Q1.3@20.408,49.633 20.942,49.1 DS1.2@22.575,49.1
NetGreen1_1: Green1.1 R16.1 | length 5.5
  Top Layer w0.5: Green1.1 94.615,18.669 R16.1
NetL5_1: L5.1 U1.4 | length 43.9
  Top Layer w1: L5.1 13.375,75.925 8.4,80.9 8.4,91.075 14.225,96.9 29.9,96.9 U1.4@31.7,95.1
NetM1_10: M1.10 R4.2 | length 15.3
  Top Layer w0.5: R4.2 23.562,28.725 M1.10
NetP11_1: 
NetP11_2: 
NetP11_3: 
NetP11_4: 
NetQ1_1: Q1.1 R1.1 R3.2 U4.4 | length 9.3
  Top Layer w1: R1.1@10.702,47.715 14.79,47.715 16.4,49.325 U4.4@16.4,50.65 ; U4.4@16.55,50.8 Q1.1
NetQ2_1: Q2.1 R17.1 | length 2.4
  Top Layer w0.5: Q2.1@61.2,11.8 61.838,11.8 R17.1
NetQ3_1: Q3.1 R18.1 | length 5.5
  Top Layer w0.5: Q3.1 77.141,4.064 R18.1
NetR2_1: R2.1 U4.1 | length 9.3
  Top Layer w1: R2.1 11.659,50.484 12.375,51.2 12.375,53.109 16.171,56.904
NetR4_1: pad.5 pad.6 R4.1 R5.2 U5.3 | length 19
  Top Layer w0.5: R5.2 5.061,18.946 pad.5@5.415,19.3 ; U5.3@8.206,20.204 8.211,20.205 6.306,20.191 pad.5@5.418,19.303 ; pad.5@5.415,19.3 pad.5 pad.5@5.418,19.303 ; pad.5@5.415,19.3 pad.5@5.418,19.303
  Top Layer w0.8: pad.6 R4.1
  Bottom Layer w0.8: pad.5 8.36,22.46 pad.6
NetR6_2: R6.2 Rf1.1 U5.2 | length 7.8
  Top Layer w0.5: Rf1.1@5.061,21.575 U5.2@7.69,21.575 ; U5.2@8.8,21.5 9.5,21.5 10.319,22.319 R6.2
NetR7_1: R7.1 U6.22 | length 3.9
  Top Layer w0.5: U6.22 R7.1@89.599,25.082
NetR8_1: R8.1 U6.21 | length 12.1
  Top Layer w0.5: U6.21 83.947,24.86 83.947,28.247 85.799,30.099 R8.1
NetR9_2: R9.2 U6.3 | length 4.5
  Top Layer w0.5: R9.2 U6.3
NetR19_2: R19.2 Red1.1 | length 2.7
  Top Layer w0.5: R19.2 Red1.1@62.052,25.959
SCL: P10.3 R10.2 U6.5 | length 27.2
  Top Layer w0.5: R10.2 U6.5@71.662,17.145
  Bottom Layer w0.5: P10.3 71.337,34.163 74.168,31.332 74.168,19.431 U6.5@71.819,17.082
SDA: P10.4 R12.1 U6.17 | length 34.1
  Top Layer w0.5: P10.4 72.263,31.623 75.692,28.194 75.692,19.431 80.041,15.082 U6.17 R12.1@89.885,15.082
ST: M1.4 P7.3 P8.4 Q2.3 R14.1 | length 38
  Top Layer w0.5: P7.3 27.921,20.216 33.763,14.374 M1.4 ; R14.1 50.292,12.192 51.562,10.922 P8.4 56.925,10.922 Q2.3@58.501,12.499
ST_in: R17.2 U6.7 | length 7
  Top Layer w0.5: R17.2 U6.7
"Test Point": P7.1 pad.42 Res1.1 Res2.2 U5.5 | length 20.5
  Top Layer w0.5: Res2.2@12.814,15.151 12.826,16.548 12.864,16.585 12.864,16.625 13.786,17.53 U5.5 ; Res1.1 17.685,25.296 P7.1
  Bottom Layer w0.5: pad.42 16.745,20.545 16.745,23.37 18.65,25.275 P7.1@19.8,25.275
USB_D+: P13.3 U7.1 | length 22.8
  Top Layer w0.254: P13.3@53.7,38.3 58.6,38.3 62.083,41.783 73,41.783 74.016,40.767 U7.1
USB_D-: P13.2 U7.2 | length 27.2
  Top Layer w0.254: P13.2@53.725,38.95 58.15,38.95 61.8,42.6 75.05,42.6 76.5,41.15 76.5,40.5 75.497,39.497 U7.2@75.3,39.497
VIDEO: P7.6 P8.6 pad.20 Rf1.2 U5.1 U6.2 | length 69.6
  Top Layer w0.5: U5.1 7.499,22.731 7.182,23.048 Rf1.2 3.748,23.048 2.5,21.8 2.5,15.284 6.458,11.326 19.158,11.326 P7.6 ; P8.6 55.209,4.1 pad.20@68.3,4.1
  Bottom Layer w0.5: pad.20 68.707,21.717 70.072,23.082 U6.2
pads on no net: M1.3 M1.5 M1.6 M1.7 M1.8 P13. P13.4 P13.MH1 P13.MH2 Res2.3 U6.4 U6.6 U6.9 U6.10 U6.11 U6.12 U6.13 U6.14 U7.4

## Polygon pours and split planes (outlines as drawn)
A-GND on Bottom Layer "Top Layer-No Net" (solid, pour order 62): 43,44 43,1 98,1 97,2 97,44
GND on Bottom Layer "Top Layer-No Net" (solid, pour order 60): 75,99 75,47 97,47 97,99
A-GND on Bottom Layer "Top Layer-No Net" (solid, pour order 58): 7,98 7,65 70,65 70,98
GND on Bottom Layer "Top Layer-No Net" (solid, pour order 56): 2,62 2,36 25,36 25,62
A-GND on Bottom Layer "Top Layer-No Net" (solid, pour order 50): 39,34 1,34 1,1 39,1

## Keep-outs
Keep-Out Layer:
  lines w0.8: 45.6,45.6 97,45.6 ; 0,0 100,0 100,99.949 0,99.949 0,0
  lines w1: 28,37 28,62

## Silkscreen, mask and mechanical layers (free items; w line width, h text height)
Top Overlay:
  text "GND" at 75.9,96.4 h1.52
  text "5V" at 51.35,95.825 h1.52
  text "AGND" at 55.1,95.8 h1.52
  text "3V3" at 62.2,95.8 h1.52
  text "GND" at 75.9,93.8 h1.52
  text "6V" at 77.275,91.175 h1.52
  text "6V" at 77.3,88.575 h1.52
  text "6V" at 12.05,82.1 h1.52
  text "GND" at 10.6,79.55 h1.52
  text "AGND" at 3.05,57.25 h1.52
  text "LAMP" at 3.05,54.3 h1.52
  text "VCC" at 75.5,53.4 h1.52
  text "GND" at 75.3,50.825 h1.52
  text "6V" at 11.6,37.725 h1.52 r90
  text "GND" at 14.275,36.2 h1.52 r90
  text "testP" at 25.925,24.775 h1.52
  text "5V" at 26,22.1 h1.52
  text "ST" at 26.025,19.55 h1.52
  text "AGND" at 26.85,16.85 h1.52
  text "CLK" at 26.025,14.275 h1.52
  text "VIDEO" at 25.975,11.675 h1.52
  text "A53SCV" at 49.225,2.35 h1.52
  text "LAMP" at 93.25,0.95 h1.52
  text "AGND" at 86.7,0.9 h1.52
Mechanical 13:
  lines w0.8: 2,35 39.967,35 ; 2.5,64 71,64 ; 42,2 42,62 ; 73,48 73,97

## Text inside footprints (layer, text, board x,y; h text height)
M2: Top Overlay "In-" at 81.518,63.459 h1.52 r90; Top Overlay "In+" at 91.805,63.459 h1.52 r90; Top Overlay "Out-" at 81.772,72.984 h1.52 r90; Top Overlay "Out+" at 91.805,72.984 h1.52 r90